# Allegro board ESP332.brd
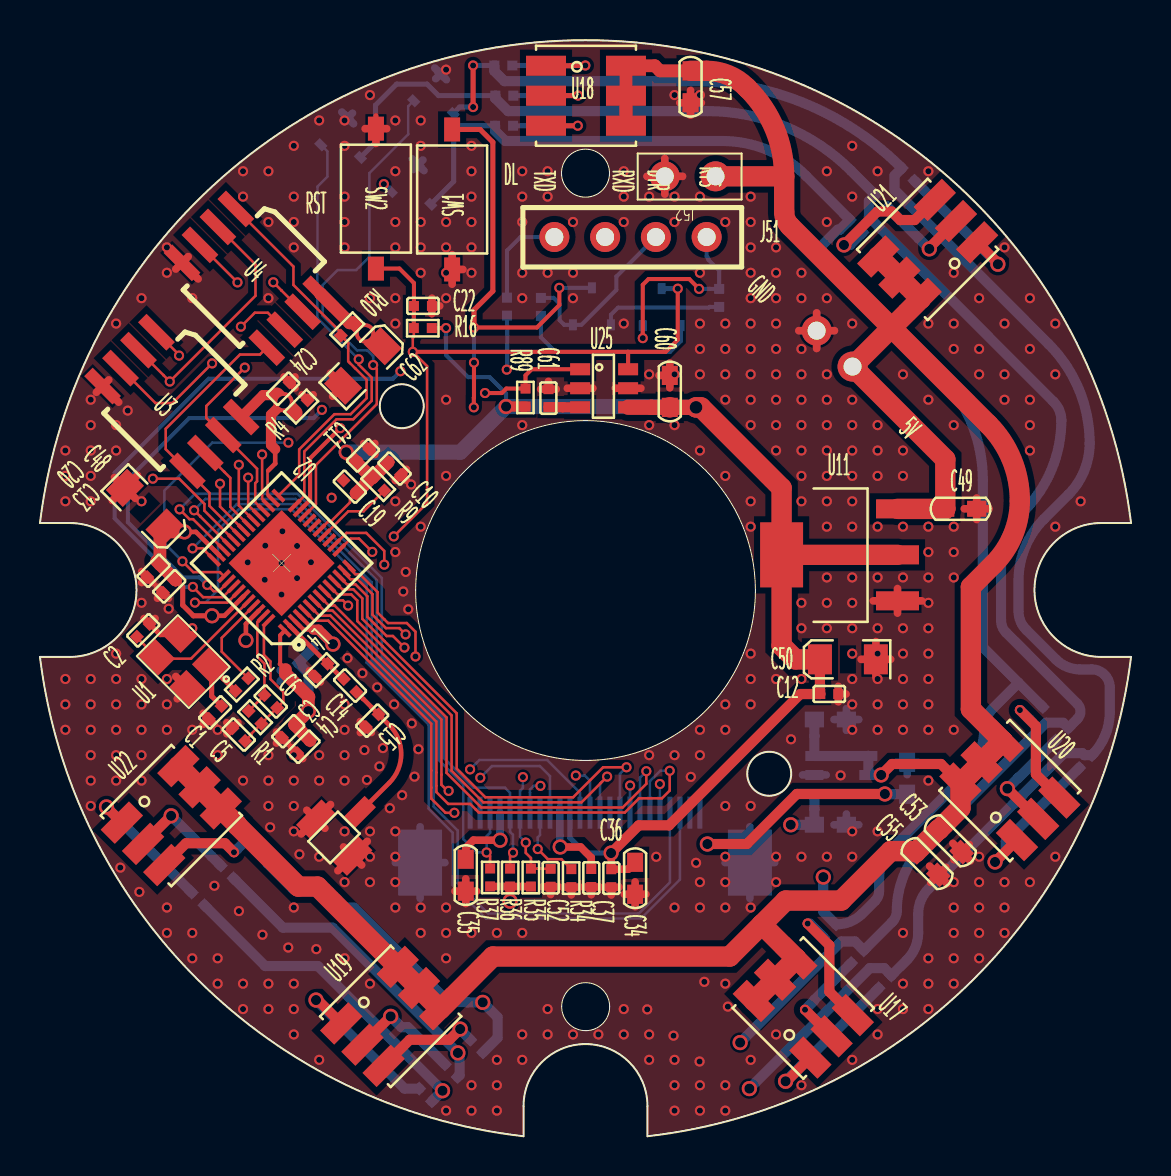
[diagram p0: board, top side]
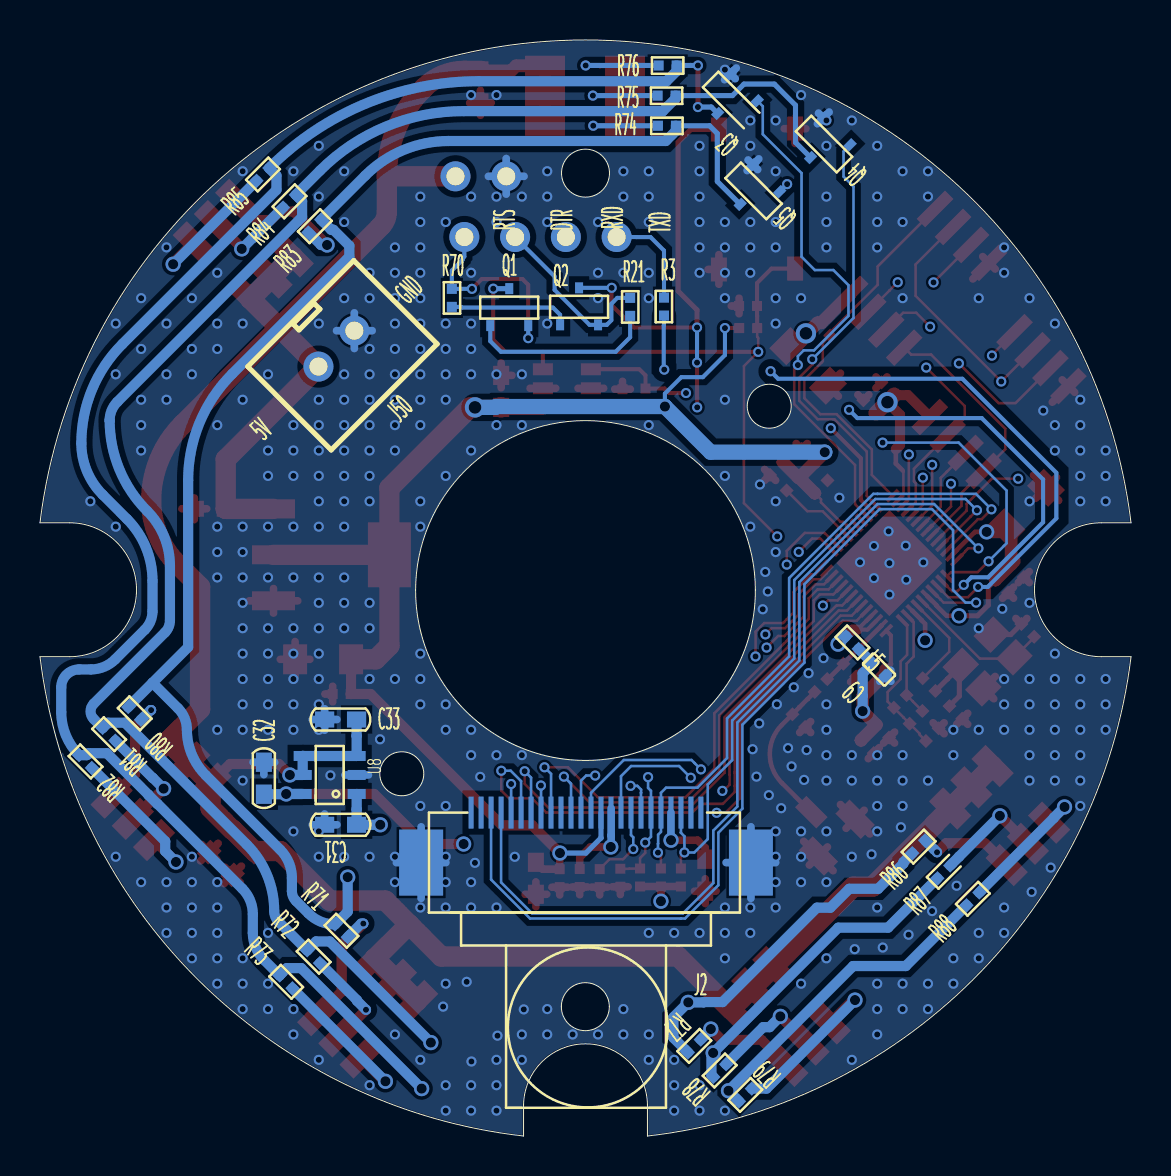
[diagram p1: board, bottom side, seen from below]

Outline 54.59 x 54.82 mm; copper layers: TOP, GND, SIG, BOTTOM. Coordinates in mm from the lower left corner of the outline.
Outline path: circle c18.1,36.51 r1.1 ; circle c27.3,48.16 r1.2 ; circle c36.49,18.12 r1.1 ; 0,30.67 arc(27.3,54.82) 54.59,30.67 53.11,30.67 arc(49.76,27.32) 53.11,23.97 54.59,23.97 arc(46.65,7.79) 30.4,0 30.4,1.51 arc(27.3,4.61) 24.2,1.51 24.2,0 arc(7.94,7.79) 0,23.97 1.48,23.97 arc(4.83,27.32) 1.48,30.67 0,30.67 ; 18.8,27.32 arc(27.3,35.82) 35.8,27.32 arc(27.3,18.82) 18.8,27.32 ; 26.1,6.47 arc(27.3,7.67) 28.5,6.47 arc(27.3,5.27) 26.1,6.47

## Design rules (mm)
net group DTR: nets DTR N16908429
net group RTS: nets N16908427 RTS
net group LED_B: nets LED_B N16960286 N16960785 N16961158 N16961522 N16961899 N16962291
net group LED_G: nets LED_G N16960306 N16960795 N16961160 N16961524 N16961901 N16962293
net group LED_R: nets LED_R N16960332 N16960797 N16961162 N16961526 N16961903 N16962295
net group RF: nets N16860839 N16860948 N16861170 N16861179 N16861214 N16861260 N16861530 N16861598 N16884685

## Placement (name value [footprint] x y rotation side)
C1  GRM1555C1H150JA01D  [C0402]  9.08 21.51 225 top
C2  GRM1555C1H150JA01D  [C0402]  4.85 24.98 45 top
C3  100pF/6.3V(10%)  [C0402]  12.74 20.57 225 top
C4  0.1uF/6.3V(10%)  [C0402]  13.51 19.79 225 top
C5  10nF/6.3V(10%)  [C0402]  10.26 19.76 135 top
C6  3.3nF/6.3V(10%)  [C0402]  11.23 22.06 315 top
C9  0.1uF/6.3V(10%)  [C0402]  12.93 23.66 225 bottom
C10  0.1uF/6.3V(10%)  [C0402]  17.42 33.71 315 top
C11  1uF/10V(20%)  [C0402]  15.84 33.73 45 top
C12  10uF/6.3V(20%)  [C0402]  39.04 22.11 0 top
C13  10uF/6.3V(20%)  [C0402]  6.79 27.81 225 top
C14  LQP15MN3N6B02D  [C0402]  15.2 22.86 314.3 top
C15  GRM1555C1H2R0BA01D  [C0402]  16.3 20.46 45 top
C19  0.1uF/6.3V(10%)  [C0402]  15.82 32.16 135 top
C20  1uF/10V(20%)  [C0402]  6 28.6 225 top
C22  1uF/10V(20%)  [C0402]  18.71 41.52 0 top
C24  1uF/10V(20%)  [C0402]  11.85 37.06 45 top
C31  10uF/10V(20%)  [C0603]  40.35 15.57 180 bottom
C32  10uF/10V(20%)  [C0603]  43.39 18.7 270 bottom
C33  10uF/10V(20%)  [C0603]  40.35 20.83 180 bottom
C34  4.7uF/10V(20%)  [C0603]  29.78 13.69 270 top
C35  4.7uF/10V(20%)  [C0603]  21.3 13.85 270 top
C36  0.1uF/16V(10%)  [C0402]  28.58 13.35 270 top
C37  1uF/10V(20%)  [C0402]  27.58 13.36 270 top
C48  47uF/6.3V(20%)  [C1206]  6.23 30.44 315 top
C49  10uF/16V  [C0603]  45.27 31.38 0 top
C50  22uF/16V  [C1206]  39.03 23.84 180 top
C52  1uF/10V(20%)  [C0402]  25.55 13.37 270 top
C53  0.1uF/16V  [C0603]  44.98 15.33 315 top
C55  0.1uF/16V  [C0603]  43.82 14.19 315 top
C57  0.1uF/16V  [C0603]  32.55 53.28 270 top
C60  0.1uF/16V  [C0603]  31.51 36.45 90 top
C61  220nF/6.3V  [C0402]  25.44 36.46 90 top
C62  47uF/10V(20%)  [C1206]  17.15 39.51 45 top
J2  FFC_24P_0P5  [OV9650FSL_PCB]  21.52 16.18 180 bottom
J39  IPEX  [ECT8180001581]  16 16.2 135 top
J50  CON2  [XH_2_54_2P]  40.66 38.49 135 bottom
J51  CON4  [CON_2_54_4P]  25.74 44.97 0 top
J52  CON2  [CON_2_54_2P]  33.8 48 180 top
L4  GRM1555C1H2R0BA01D  [R0402]  14.39 23.63 225 top
L5  2.0nH  [R0402]  14.26 25 225 bottom
Q1  S8050(NPN)  [SOT23-3]  31.11 42.39 180 bottom
Q2  S8050(NPN)  [SOT23-3]  27.62 42.43 180 bottom
Q3  S8050(NPN)  [SOT23-3]  20.68 51.15 45 bottom
Q4  S8050(NPN)  [SOT23-3]  16.03 48.95 45 bottom
Q5  S8050(NPN)  [SOT23-3]  19.55 46.6 45 bottom
R1  20K(5%)  [R0402]  10.44 21.26 315 top
R2  51R(5%)  [R0402]  9.79 22.26 45 top
R3  499R(1%)  [R0402]  23.37 41.04 90 bottom
R4  2K/NC  [R0402]  12.76 36.17 45 top
R9  10K(1%)(NC)  [R0402]  16.6 32.93 315 top
R10  10K(1%)  [R0402]  15.69 40.68 225 top
R16  10K(1%)  [R0402]  19.61 40.41 180 top
R21  12K(1%)  [R0402]  25.06 41.92 270 bottom
R34  10K(1%)  [R0402]  26.59 12.45 90 top
R35  10K(1%)  [R0402]  24.57 12.48 90 top
R36  3.3K(5%)  [R0402]  23.52 13.38 270 top
R37  3.3K(5%)  [R0402]  22.52 13.38 270 top
R70  12K(1%)  [R0402]  33.98 42.37 270 bottom
R71  100  [R0402]  39.83 10.58 225 bottom
R72  100  [R0402]  41.22 9.29 225 bottom
R73  100  [R0402]  42.6 8.03 225 bottom
R74  100  [R0402]  22.77 50.54 0 bottom
R75  100  [R0402]  22.79 52.04 0 bottom
R76  100  [R0402]  22.73 53.55 0 bottom
R77  100  [R0402]  22.17 4.18 135 bottom
R78  100  [R0402]  20.9 2.95 135 bottom
R79  100  [R0402]  19.61 1.73 135 bottom
R80  100  [R0402]  50.17 21.46 225 bottom
R81  100  [R0402]  51.46 20.41 225 bottom
R82  100  [R0402]  52.63 19.05 225 bottom
R83  100  [R0402]  40.52 45.83 315 bottom
R84  100  [R0402]  41.79 47.08 315 bottom
R85  100  [R0402]  43.12 48.42 315 bottom
R86  100  [R0402]  10.94 14.15 135 bottom
R87  100  [R0402]  9.68 12.89 135 bottom
R88  100  [R0402]  8.23 11.54 135 bottom
R89  10K(1%)  [R0402]  24.29 36.49 90 top
SW1  SW PUSHBUTTON  [KEY_3X6]  20.62 43.35 90 top
SW2  SW PUSHBUTTON  [KEY_3X6]  16.81 50.39 270 top
U1  40MHz+/-10ppm  [CRY_3225]  7.39 22.39 135 top
U2  ESP32-D0WD  [SLP48_5X5]  12.09 28.65 135 top
U3  EN25QH128A  [RZ7889]  4.45 34.47 315 top
U4  PSRAM64H  [RZ7889]  8.43 40.64 315 top
U8  RT9011-BM-PJ6  [SOT-23-6]  40.1 18.06 90 bottom
U11  TLV1117-33IDCY  [SOT223]  42.91 26.77 90 top
U17  RGB  [RGB_6]  38.19 6.4 315 top
U18  RGB  [RGB_6]  27.32 52.04 180 top
U19  RGB  [RGB_6]  17.55 5.98 225 top
U20  RGB  [RGB_6]  48.53 17.28 315 top
U21  RGB  [RGB_6]  44.42 44.35 45 top
U22  RGB  [RGB_6]  6.57 16.03 225 top
U25  TPS3813K33DBVT  [SOT23-6]  27.03 38.35 0 top

## Library data of the parts
C1-C6 C9-C15 C19 C20 C22 C24 C31-C37 C48-C50 C52 C53 C55 C57 C60-C62 = CAP NP
J2 = CON24_4
J39 = IPEX_0
J50 J52 = CON2
J51 = CON4
L4 L5 = CHOKE
Q1-Q5 = NPN BCE_2
R1-R4 R9 R10 = RESISTOR
R16 R89 = RESISTOR_0: signal model: DEFAULT_RESISTOR_10000OHM_1_2
R21 R34-R37 R70-R88 = RESISTOR_0: signal model: DEFAULT_RESISTOR_200OHM_1_2
SW1 = SW PUSHBUTTON_0
SW2 = SW PUSHBUTTON
U1 = X1_1
U2 = ESP8080_24
U3 = FLASH_3
U4 = PN18S32
U8 = NCP1117_3
U11 = TLV1117-33IDCY
U17-U22 = LED_RGB
U25 = TPS3813K33DBVT

## Footprints (pads in the part's own frame, mm; a bottom-side part is the same pattern mirrored in y, then rotated)
C0402
  rect 0.5x0.5 smd: 1(0,0) 2(0.9,0)
C0603
  rect 0.96x0.8 smd: 1(0,0) 2(1.6,0)
C1206
  rect 1.2x1.5 smd: 1(0,0) 2(-2.8,0)
CON_2_54_2P
  round 1.5 hole 0.9: 1(0,0) 2(2.54,0)
CON_2_54_4P
  round 1.5 hole 0.9: 1(0,0) 2(2.54,0) 3(5.08,0) 4(7.62,0)
CRY_3225
  rect 1.4x1.2 smd: 1(0,-1.6) 2(2.2,-1.6) 3(2.2,0) 4(0,0)
ECT8180001581
  rect 0.8x1.5 smd: 1(0,0)
  rect 1x1.8 smd: 2(-1.3,1.8) 3(1.3,1.8)
KEY_3X6
  rect 1.2x0.8 smd: 1(0,0) 2(7,0)
OV9650FSL_PCB
  rect 0.25x1.6 smd: 1(0,0) 2(-0.5,0) 3(-1,0) 4(-1.5,0) 5(-2,0) 6(-2.5,0) 7(-3,0) 8(-3.5,0) 9(-4,0) 10(-4.5,0) 11(-5,0) 12(-5.5,0) 13(-6,0) 14(-6.5,0) 15(-7,0) 16(-7.5,0) 17(-8,0) 18(-8.5,0) 19(-9,0) 20(-9.5,0) 21(-10,0) 22(-10.5,0) 23(-11,0) 24(-11.5,0)
  rect 2.2x3.3 smd: 25(-14,-2.5) 26(2.5,-2.5)
R0402
  rect 0.5x0.5 smd: 1(0,0) 2(0.9,0)
RGB_6
  rect 2x1 smd: 1(2,-1.5) 2(2,0) 3(2,1.5) 4(-2,1.5) 5(-2,0) 6(-2,-1.5)
RZ7889
  rect 2x0.6 smd: 1(-3.082,5.025) 2(-3.082,3.755) 3(-3.082,2.485) 4(-3.082,1.215) 5(2.918,1.215) 6(2.918,2.485) 7(2.918,3.755) 8(2.918,5.025)
SLP48_5X5
  rect 0.8x0.2 smd: 1(-2.5,2.275) 2(-2.5,1.925) 3(-2.5,1.575) 4(-2.5,1.225) 5(-2.5,0.875) 6(-2.5,0.525) 7(-2.5,0.175) 8(-2.5,-0.175) 9(-2.5,-0.525) 10(-2.5,-0.875) 11(-2.5,-1.225) 12(-2.5,-1.575) 13(-2.5,-1.925) 14(-2.5,-2.275) 25(2.5,-2.275) 26(2.5,-1.925) 27(2.5,-1.575) 28(2.5,-1.225) 29(2.5,-0.875) 30(2.5,-0.525) 31(2.5,-0.175) 32(2.5,0.175) 33(2.5,0.525) 34(2.5,0.875) 35(2.5,1.225) 36(2.5,1.575) 37(2.5,1.925) 38(2.5,2.275)
  rect 0.2x0.8 smd: 15(-1.575,-2.5) 16(-1.225,-2.5) 17(-0.875,-2.5) 18(-0.525,-2.5) 19(-0.175,-2.5) 20(0.175,-2.5) 21(0.525,-2.5) 22(0.875,-2.5) 23(1.225,-2.5) 24(1.575,-2.5) 39(1.575,2.5) 40(1.225,2.5) 41(0.875,2.5) 42(0.525,2.5) 43(0.175,2.5) 44(-0.175,2.5) 45(-0.525,2.5) 46(-0.875,2.5) 47(-1.225,2.5) 48(-1.575,2.5)
  rect 3.75x3.75 smd: 49(0,0)
SOT23-3
  rect 0.4x0.55 smd: 1(-0.95,-1.85) 2(0.95,-1.85) 3(0,0)
SOT23-6
  rect 1x0.6 smd: 1(0,0) 2(0,-0.95) 3(0,-1.9) 4(2.4,-1.9) 5(2.4,-0.95) 6(2.4,0)
SOT223
  rect 0.95x2.15 smd: 1(0,0) 2(2.3,0) 3(4.6,0)
  rect 3.25x2.15 smd: 4(2.3,5.8)
SOT-23-6
  rect 0.5x0.9 smd: 1(-0.95,-1.35) 2(0,-1.35) 3(0.95,-1.35) 4(0.95,1.35) 5(0,1.35) 6(-0.95,1.35)
XH_2_54_2P
  round 1.5 hole 0.9: 1(0,0) 2(2.54,0)

## Nets
AGND: C1.2 C2.2 C3.2 C4.2 C5.2 C9.2 C10.2 C11.2 C12.2 C13.2 C15.1 C19.2 C20.2 C22.2 C24.2 C31.1 C32.1 C33.1 C34.2 C35.2 C36.2 C37.2 C48.2 C49.2 C50.2 C52.2 C53.2 C55.2 C57.2 C60.2 C61.2 C62.2 J2.2(AGND) J2.15(DGND) J2.25(GND#25) J2.26(GND#26) J39.2(GND1) J39.3(GND2) J50.2 J52.2 L4.2 Q3.2(E) Q4.2(E) Q5.2(E) R4.2 R34.1 SW1.1 SW2.1 U1.2(GND#2) U1.4(GND#4) U2.49(GND) U3.4(GND) U4.4(VSS) U8.2(GND) U11.1(ADJ/GND) U25.2(GND) U25.5(WDR)
AVDD_2V8: C31.2 C35.1 J2.4(AVDD) U8.1(VOUT2)
DVDD_1V3: C32.2 C37.1 J2.10(DVDD) U8.6(VOUT1)
VBUS: C33.2 C49.1 C53.1 C55.1 C57.1 J50.1 J52.1 U8.3(EN2) U8.4(EN1) U8.5(VIN) U11.3(INPUT) U17.4(BA) U17.5(GA) U17.6(RA) U18.4(BA) U18.5(GA) U18.6(RA) U19.4(BA) U19.5(GA) U19.6(RA) U20.4(BA) U20.5(GA) U20.6(RA) U21.4(BA) U21.5(GA) U21.6(RA) U22.4(BA) U22.5(GA) U22.6(RA)
VDD_SDIO: C24.1 C62.1 R4.1 R10.1 U2.26(VDD_SDIO) U3.8(VCC) U4.8(VDD)
B: Q5.1(B) U2.34(GPIO5)
CAM_RESET: C52.1 J2.6(RESET) R35.2 U2.13(32K_XN)
DOVDD_3V3: C3.1 C4.1 C9.1 C10.1 C11.1 C12.1 C13.1 C19.1 C20.1 C34.1 C36.1 C48.1 C50.1 C60.1 J2.11(DOVDD) L5.2 R9.1 R16.1 R35.1 R36.2 R37.2 R89.1 U2.1(VDDA#1) U2.19(VDD3P3_RTC) U2.37(VDD3P3_CPU) U2.43(VDDA#43) U2.46(VDDA#46) U11.2(OUTPUT#2) U11.4(OUTPUT#4) U25.4(VCC)
DTR: J51.3 Q2.2(E) R21.1
DVP_HREF: J2.9(HREF) U2.5(SENSOR_VP)
DVP_PCLK: J2.17(PCLK) U2.12(32K_XP)
DVP_VSYNC: J2.7(VSYNC) U2.15(GPIO26)
DVP_Y2: J2.19(Y2) U2.6(SENSOR_CAPP)
DVP_Y3: J2.21(Y3) U2.38(GPIO19)
DVP_Y4: J2.22(Y4) U2.42(GPIO21)
DVP_Y5: J2.20(Y5) U2.16(GPIO27)
DVP_Y6: J2.18(Y6) U2.8(SENSOR_VN)
DVP_Y7: J2.16(Y7) U2.11(VDET_2)
DVP_Y8: J2.14(Y8) U2.10(VDET_1)
DVP_Y9: J2.12(Y9) U2.7(SENSOR_CAPN)
EN: C22.1 Q1.3(C) R16.2 SW2.2 U2.9(CHIP_PU) U25.6(R\E\S\E\T\)
FLASH_CLK: U2.31(SD_CLK) U3.6(CLK)
G: Q4.1(B) U2.24(GPIO4)
I2C_SCL: J2.5(SCL) R36.1 U2.36(GPIO23)
I2C_SDA: J2.3(SDA) R37.1 U2.35(GPIO18)
IO0: Q2.3(C) SW1.2 U2.23(GPIO0)
IO2: Q3.1(B) U2.22(GPIO2)
IO12: R9.2 U2.18(MTDI)
IO16: R10.2 U2.25(GPIO16) U4.1(CS#)
IO17: U2.27(GPIO17) U4.6(SCLK)
IO25: J2.13(XCLK) U2.14(GPIO25)
LED_B: Q5.3(C) R71.1 R74.1 R77.1 R80.1 R83.1 R86.1
LED_G: Q4.3(C) R72.1 R75.1 R78.1 R81.1 R84.1 R87.1
LED_R: Q3.3(C) R73.1 R76.1 R79.1 R82.1 R85.1 R88.1
PWDN: J2.8(PWDN) R34.2
RTS: J51.4 Q1.2(E) R70.1
RXD0: J51.2 U2.40(U0RXD)
SCS/CMD: U2.30(SD_CMD) U3.1(/CS)
SDI/SD1: U2.33(SD_DATA_1) U3.5(DI) U4.5(SI/SIO0)
SDO/SD0: U2.32(SD_DATA_0) U3.2(DO) U4.2(SO/SIO1)
SHD/SD2: U2.28(SD_DATA_2) U3.7(/HOLD) U4.7(SIO3)
SWP/SD3: U2.29(SD_DATA_3) U3.3(/WP) U4.3(SIO2)
TXD0: J51.1 R3.2
WDI: R89.2 U2.39(GPIO22) U25.1(WDI)
N16860839: C5.1 C6.2 R1.2 U2.48(CAP1)
N16860948: L5.1 U2.3(VDD3P3#3) U2.4(VDD3P3#4)
N16861170: C14.2 C15.2 J39.1(RF)
N16861179: C2.1 U1.3(XOUT) U2.44(XTAL_N)
N16861214: C1.1 R2.1 U1.1(XIN)
N16861260: C6.1 R1.1 U2.47(CAP2)
N16861530: R3.1 U2.41(U0TXD)
N16861598: R2.2 U2.45(XTAL_P)
N16884685: C14.1 L4.1 U2.2(LNA_IN)
N16908427: Q2.1(B) R70.2
N16908429: Q1.1(B) R21.2
N16960286: R71.2 U17.3(BK)
N16960306: R72.2 U17.2(GK)
N16960332: R73.2 U17.1(RK)
N16960785: R74.2 U18.3(BK)
N16960795: R75.2 U18.2(GK)
N16960797: R76.2 U18.1(RK)
N16961158: R77.2 U19.3(BK)
N16961160: R78.2 U19.2(GK)
N16961162: R79.2 U19.1(RK)
N16961522: R80.2 U20.3(BK)
N16961524: R81.2 U20.2(GK)
N16961526: R82.2 U20.1(RK)
N16961899: R83.2 U21.3(BK)
N16961901: R84.2 U21.2(GK)
N16961903: R85.2 U21.1(RK)
N16962291: R86.2 U22.3(BK)
N16962293: R87.2 U22.2(GK)
N16962295: R88.2 U22.1(RK)
N16988764: C61.1 U25.3(WDT)

Pads without a net: J2 1 23 24; U2 17 20 21

## Via types
v1: diameter 0.508, hole 0.305, TOP to BOTTOM, 489 vias
v2: diameter 0.762, hole 0.508, TOP to BOTTOM, 32 vias
v3: diameter 1.016, hole 0.635, TOP to BOTTOM, 3 vias

## Routing (per net, layer and track width the routed paths; a pad name or vN(x,y) marks a point on that pad's centre or on a via; arc(x,y) is an arc through that point)
AGND: length 124.7
  TOP w0.254: C2.2 6.02,25.08 U1.2 ; 16.81,51.04 SW2.1
  TOP w0.381: J39.2 16.38,14.74 ; J39.2 15.19,14.46 ; J39.2 14.91,13.27 ; J39.2 16.09,13.55 ; SW1.1 20.62,44.09 ; SW1.1 20.62,42.61 ; SW1.1 21.16,43.35 ; 46.25,31.38 C49.2 ; C49.2 46.87,31.91 ; C49.2 46.87,30.84 ; C49.2 47.49,31.38 ; 29.78,11.47 C34.2 ; C34.2 29.78,12.71 ; C34.2 29.24,12.09 ; C34.2 30.32,12.09 ; 44.57,12.68 C55.2 ; C55.2 45.33,13.44 ; C55.2 45.39,12.62 ; C55.2 44.51,13.5 ; U3.4 3.44,37.82 ; U3.4 3.94,36.71 ; U3.4 2.82,37.2 ; 41.69,26.77 U11.1 ; U11.1 44.12,26.77 ; U11.1 42.91,26.16 ; U11.1 42.91,27.38 ; 6.87,21.87 U1.4 6.8,22.99 ; C3.2 12.38,19.66 ; C3.2 11.83,19.66 ; C3.2 11.83,20.21 ; C10.2 18.33,33.35 ; C10.2 18.33,32.8 ; C10.2 17.78,32.8 ; C11.2 16.75,34.09 ; C11.2 16.2,34.64 ; C11.2 16.75,34.64 ; 28.58,12.06 C36.2 ; C36.2 28.19,12.45 ; C36.2 28.97,12.45 ; 32.55,51.06 C57.2 ; C57.2 33.09,51.68 ; C57.2 32.55,52.3 ; C57.2 32.01,51.68 ; 25.16,12.47 C52.2 ; C52.2 25.94,12.47 ; C52.2 25.55,12.08 ; 13.35,16.3 J39.3 ; J39.3 13.07,15.11 ; J39.3 14.26,15.39 ; J39.3 14.54,16.58 ; U4.4 7.42,43.99 ; U4.4 7.91,42.87 ; U4.4 6.3,44.48 ; U4.4 6.8,43.37 ; C22.2 19.61,41.91 ; C22.2 20,41.52 ; C22.2 19.61,41.13 ; 12.59,19.43 C4.2 13.15,18.88 ; 26.2,12.45 R34.1 ; R34.1 26.98,12.45 ; R34.1 26.59,12.06 ; 16.27,50.39 SW2.1 ; SW2.1 17.35,50.39 ; SW2.1 16.81,49.65 ; 13.48,23.26 L4.2 14.03,22.71 ; C53.2 46.5,14.58 ; C53.2 45.68,14.64 ; C53.2 46.55,13.76 ; C53.2 45.73,13.82 ; C61.2 25.44,37.75 ; C61.2 25.83,37.36 ; C61.2 25.05,37.36 ; 14.54,38.16 C62.2 14.64,37.01 ; C24.2 12.76,37.97 ; C24.2 12.76,37.42 ; C24.2 12.21,37.97 ; 16.03,20.73 C15.1 ; C15.1 16.03,20.18 ; C15.1 16.58,20.18 ; 8.17,20.6 C1.2 ; C1.2 8.72,20.6 ; C1.2 8.17,21.15 ; J50.2 38.86,41.17 ; J50.2 39.75,40.28 ; J50.2 37.97,40.28 ; J50.2 38.86,39.39 ; 5.09,28.23 C20.2 ; C20.2 5.64,27.68 ; C20.2 5.09,27.68 ; C12.2 40.33,22.11 ; C12.2 39.94,22.5 ; C12.2 39.94,21.72 ; 5.88,27.45 6.15,27.18 ; 6.15,27.18 6.43,26.9 ; 6.15,27.18 5.88,26.9 ; 20.76,12.25 C35.2 ; C35.2 21.3,12.87 ; C35.2 21.3,11.63 ; C35.2 21.84,12.25 ; 26.39,37.4 U25.2 27.67,37.4 ; C60.2 31.51,38.67 ; C60.2 30.97,38.05 ; C60.2 31.51,37.43 ; C48.2 4.77,31.9 ; C48.2 3.62,31.79 ; C48.2 4.88,33.05 ; C48.2 3.73,32.94 ; 41.83,22.95 C50.2 ; C50.2 42.57,23.84 ; C50.2 41.09,23.84 ; C50.2 41.83,24.73 ; 27.58,12.07 C37.2 ; C37.2 27.19,12.46 ; C37.2 27.97,12.46 ; 31.26,47.11 J52.2 ; J52.2 32.15,48 ; J52.2 31.26,48.89 ; J52.2 30.37,48 ; C5.2 9.9,20.67 ; C5.2 9.35,20.12 ; C5.2 9.35,20.67 ; 5.21,25.89 C2.2 5.76,25.89 ; 28.79,37.4 U25.5 30.07,37.4 ; 13.67,37.08 R4.2 13.12,37.08
  GND w0.127: J52.2 32.15,48 ; J52.2 30.37,48 ; J52.2 31.26,48.89 ; J52.2 31.26,47.11 ; 37.97,40.28 J50.2 ; J50.2 38.86,41.17 ; J50.2 39.75,40.28 ; J50.2 38.86,39.39
  SIG w0.127: 31.26,47.11 J52.2 ; J52.2 30.37,48 ; J52.2 32.15,48 ; J52.2 31.26,48.89 ; 37.97,40.28 J50.2 ; J50.2 38.86,41.17 ; J50.2 39.75,40.28 ; J50.2 38.86,39.39
  BOTTOM w0.381: 19.75,53.42 Q3.2 ; Q3.2 20.28,53.37 ; Q3.2 20.34,52.84 ; Q3.2 19.8,52.89 ; C31.1 40.97,15.57 ; C31.1 40.35,16.11 ; C31.1 39.73,15.57 ; Q5.2 19.21,48.29 ; Q5.2 19.16,48.82 ; Q5.2 18.62,48.88 ; Q5.2 18.68,48.34 ; 31.26,47.11 J52.2 ; J52.2 31.26,48.89 ; J52.2 30.37,48 ; J52.2 32.15,48 ; C33.1 40.97,20.83 ; C33.1 39.73,20.83 ; C33.1 40.35,21.37 ; C33.1 40.35,20.29 ; C9.2 12.57,22.75 ; C9.2 12.02,22.75 ; C9.2 12.02,23.3 ; 19.02,11.89 J2.26 ; J2.26 17.78,13.68 ; J2.26 19.02,15.47 ; J2.26 20.26,13.68 ; 43.39,18.08 C32.1 ; C32.1 43.93,18.7 ; C32.1 43.39,18.88 ; C32.1 42.85,18.7 ; 34.28,13.68 J2.25 ; J2.25 35.52,11.89 ; J2.25 35.52,15.47 ; J2.25 36.76,13.68 ; 39.34,18.06 U8.2 38.16,18.06 ; Q4.2 15.64,51.17 ; Q4.2 15.69,50.63 ; Q4.2 15.1,51.22 ; 38.86,39.39 J50.2 ; J50.2 37.97,40.28 ; J50.2 39.75,40.28 ; J50.2 38.86,41.17
  vias: v1(1.27,34.29) v1(1.27,33.02) v1(1.27,31.75) v1(1.27,22.86) v1(1.27,21.59) v1(1.27,20.32) v1(2.54,36.83) v1(2.54,35.56) v1(2.54,34.29) v1(2.54,33.02) v1(2.54,31.75) v1(2.54,22.86) v1(2.54,21.59) v1(2.54,20.32) v1(2.54,19.05) v1(2.54,17.78) v1(2.54,16.51) v1(3.81,40.64) v1(3.81,35.56) v1(3.81,34.29) v1(3.81,24.13) v1(3.81,22.86) v1(3.81,21.59) v1(3.81,20.32) v1(3.81,19.05) v1(3.81,17.78) v1(4.02,13.43) v1(4.39,36.29) v1(4.97,12.21) v1(5.08,41.91) v1(5.08,31.75) v1(5.08,26.67) v1(5.08,22.86) v1(5.08,21.59) v1(5.08,20.32) v1(5.08,19.05) v1(5.08,17.78) v1(6.35,44.45) v1(6.35,43.18) v1(6.44,26.37) v1(6.35,22.86) v1(6.35,21.59) v1(6.35,20.32) v1(6.35,11.43) v1(6.35,10.16) v1(7.62,41.91) v1(7.62,25.4) v1(7.62,20.32) v1(7.62,10.16) v1(7.62,8.89) v1(8.73,12.52) v1(8.89,20.32) v1(8.89,19.05) v1(8.89,8.89) v1(8.89,7.62) v1(9.95,11.25) v1(10.16,48.26) v1(10.16,46.99) v1(10.16,17.78) v1(10.16,7.62) v1(10.16,6.35) v1(10.39,28.7) v1(11.13,10.07) v1(11.27,29.53) v1(11.25,27.82) v1(11.43,48.26) v1(11.43,45.72) v1(11.43,41.91) v1(11.43,19.05) v1(11.43,17.78) v1(11.43,16.51) v1(11.43,7.62) v1(11.43,6.35) v1(11.52,15.45) v1(12.13,30.25) v1(12.09,28.65) v1(12.09,27.08) v1(12.42,9.43) v1(12.7,49.53) v1(12.7,46.99) v1(12.7,45.72) v1(12.7,44.45) v1(12.7,19.05) v1(12.7,17.78) v1(12.7,16.51) v1(12.7,15.24) v1(12.7,11.43) v1(12.7,7.62) v1(12.7,6.35) v1(12.7,5.08) v1(12.86,29.52) v1(12.86,27.91) v1(12.98,14.09) v1(13.56,28.7) v1(13.83,9.35) v1(13.97,50.8) v1(13.97,19.05) v1(13.97,17.78) v1(13.97,13.97) v1(13.97,3.81) v1(14.59,31.93) v1(15.24,50.8) v1(15.24,49.53) v1(15.24,46.99) v1(15.24,45.72) v1(15.24,44.45) v1(15.24,21.59) v1(15.24,20.32) v1(15.24,19.05) v1(15.24,17.78) v1(15.24,15.24) v1(15.24,12.7) v1(15.24,8.89) v1(15.39,23.9) v1(16.13,23.15) v1(16.23,19.31) v1(16.36,17.81) v1(16.51,52.07) v1(16.51,41.91) v1(16.51,15.24) v1(16.51,13.97) v1(16.51,12.7) v1(16.51,7.62) v1(16.87,22.44) v1(16.98,18.49) v1(17.16,19.4) v1(17.51,16.4) v1(17.72,21.59) v1(17.78,50.8) v1(17.78,48.26) v1(17.78,45.72) v1(17.78,44.45) v1(17.78,41.91) v1(17.78,40.64) v1(17.78,31.75) v1(17.78,29.21) v1(17.78,15.24) v1(17.78,13.97) v1(17.78,12.7) v1(17.78,11.43) v1(18.12,17.05) v1(18.18,27.24) v1(18.3,28.22) v1(18.43,26.35) v1(18.57,32.59) v1(18.6,20.64) v1(18.74,17.98) v1(18.94,19.35) v1(19.05,50.8) v1(19.05,49.53) v1(19.05,45.72) v1(19.05,44.45) v1(19.05,43.18) v1(19.05,30.48) v1(19.05,11.43) v1(19.05,10.16) v1(20.32,53.34) v1(20.32,45.72) v1(20.32,44.45) v1(20.32,43.18) v1(20.32,41.91) v1(20.32,36.83) v1(20.32,33.02) v1(20.32,11.43) v1(20.32,10.16) v1(20.32,8.89) v1(20.32,1.27) v1(21.59,49.53) v1(21.59,48.26) v1(21.59,46.99) v1(21.59,45.72) v1(21.59,44.45) v1(21.59,43.18) v1(21.59,10.16) v1(21.59,2.54) v1(21.59,1.27) v1(22.86,10.16) v1(22.86,3.81) v1(22.86,2.54) v1(22.86,1.27) v1(24.13,48.26) v1(24.13,46.99) v1(24.13,45.72) v1(24.13,43.18) v1(24.13,41.91) v1(24.13,35.56) v1(24.13,10.16) v1(24.13,5.08) v1(24.13,3.81) v1(25.4,48.26) v1(25.4,46.99) v1(25.4,43.18) v1(25.4,6.35) v1(25.4,5.08) v1(26.67,45.72) v1(26.67,43.18) v1(26.67,41.91) v1(26.67,5.08) v1(27.94,5.08) v1(29.21,48.26) v1(29.21,46.99) v1(29.21,45.72) v1(29.21,40.64) v1(29.21,6.35) v1(29.21,5.08) v1(30.38,6.33) v1(30.48,46.99) v1(30.48,38.1) v1(30.48,35.56) v1(30.48,19.05) v1(30.48,5.08) v1(30.48,3.81) v1(30.83,13.97) v1(31.7,5.02) v1(31.75,52.07) v1(31.75,46.99) v1(31.75,45.72) v1(31.75,38.1) v1(31.75,35.56) v1(31.75,19.05) v1(31.75,11.43) v1(31.75,3.81) v1(31.75,2.54) v1(31.75,1.27) v1(32.56,17.96) v1(32.83,13.67) v1(33.02,52.07) v1(33.02,46.99) v1(33.02,43.18) v1(33.02,40.64) v1(33.02,39.37) v1(33.02,38.1) v1(33.02,34.29) v1(33.02,20.32) v1(33.02,19.05) v1(33.02,12.7) v1(33.02,11.43) v1(33,3.73) v1(33.02,2.54) v1(33.02,1.27) v1(33.24,7.71) v1(34.29,45.72) v1(34.29,40.64) v1(34.29,39.37) v1(34.29,38.1) v1(34.29,36.83) v1(34.29,33.02) v1(34.29,21.59) v1(34.29,20.32) v1(34.29,16.51) v1(34.29,13.97) v1(34.29,12.7) v1(34.29,11.43) v1(34.29,7.62) v1(34.29,2.54) v1(34.29,1.27) v1(34.42,6.47) v1(35.56,46.99) v1(35.56,45.72) v1(35.56,44.45) v1(35.56,43.18) v1(35.56,41.91) v1(35.56,40.64) v1(35.56,39.37) v1(35.56,38.1) v1(35.56,36.83) v1(35.56,35.56) v1(35.56,31.75) v1(35.56,30.48) v1(35.56,24.13) v1(35.56,22.86) v1(35.56,21.59) v1(35.56,16.51) v1(35.56,11.43) v1(35.56,3.81) v1(36.83,44.45) v1(36.83,43.18) v1(36.83,41.91) v1(36.83,40.64) v1(36.83,39.37) v1(36.83,38.1) v1(36.83,36.83) v1(36.83,35.56) v1(36.83,34.29) v1(36.83,22.86) v1(36.83,13.97) v1(36.83,12.7) v1(36.83,5.08) v1(37.58,19.84) v1(38.1,43.18) v1(38.1,41.91) v1(38.1,39.37) v1(38.1,38.1) v1(38.1,36.83) v1(38.1,35.56) v1(38.1,34.29) v1(38.1,33.02) v1(38.1,31.75) v1(38.1,26.67) v1(38.1,25.4) v1(38.1,22.86) v1(38.1,13.97) v1(38.1,2.54) v1(39.37,48.26) v1(39.37,45.72) v1(39.37,41.91) v1(39.37,38.1) v1(39.37,36.83) v1(39.37,35.56) v1(39.37,34.29) v1(39.37,33.02) v1(39.37,31.75) v1(39.37,30.48) v1(39.37,27.94) v1(39.37,26.67) v1(39.37,25.4) v1(39.37,13.97) v1(40.06,18.04) v1(40.64,49.53) v1(40.64,46.99) v1(40.64,40.64) v1(40.64,36.83) v1(40.64,35.56) v1(40.64,34.29) v1(40.64,33.02) v1(40.64,31.75) v1(40.64,30.48) v1(40.64,27.94) v1(40.64,26.67) v1(40.64,25.4) v1(40.64,24.13) v1(40.64,22.86) v1(40.64,21.59) v1(40.64,20.32) v1(40.64,15.24) v1(40.64,13.97) v1(40.64,3.81) v1(41.91,48.26) v1(41.91,35.56) v1(41.91,34.29) v1(41.91,33.02) v1(41.91,30.48) v1(41.91,27.94) v1(41.91,25.4) v1(41.91,24.13) v1(41.91,22.86) v1(41.91,21.59) v1(41.91,20.32) v1(41.91,15.24) v1(41.91,6.35) v1(41.91,5.08) v1(43.18,38.1) v1(43.18,34.29) v1(43.18,33.02) v1(43.18,30.48) v1(43.18,27.94) v1(43.18,25.4) v1(43.18,24.13) v1(43.18,22.86) v1(43.18,21.59) v1(43.18,20.32) v1(43.18,10.16) v1(43.18,7.62) v1(43.18,6.35) v1(44.45,48.26) v1(44.45,40.64) v1(44.45,36.83) v1(44.45,30.48) v1(44.45,29.21) v1(44.45,27.94) v1(44.45,26.67) v1(44.45,25.4) v1(44.45,24.13) v1(44.45,22.86) v1(44.45,21.59) v1(44.45,20.32) v1(44.45,17.78) v1(44.45,8.89) v1(44.45,7.62) v1(44.45,6.35) v1(45.72,43.18) v1(45.72,40.64) v1(45.72,39.37) v1(45.72,35.56) v1(45.72,30.48) v1(45.72,29.21) v1(45.72,27.94) v1(45.72,20.32) v1(45.72,12.7) v1(45.72,11.43) v1(45.72,10.16) v1(45.72,8.89) v1(45.72,7.62) v1(46.99,41.91) v1(46.99,39.37) v1(46.99,38.1) v1(46.99,13.97) v1(46.99,12.7) v1(46.99,11.43) v1(46.99,10.16) v1(46.99,8.89) v1(48.26,44.45) v1(48.26,40.64) v1(48.26,38.1) v1(48.26,36.83) v1(48.26,12.7) v1(48.26,11.43) v1(48.26,10.16) v1(49.53,41.91) v1(49.53,39.37) v1(49.53,36.83) v1(49.53,35.56) v1(49.53,34.29) v1(49.53,12.7) v1(50.8,40.64) v1(50.8,38.1) v1(50.8,30.48) v1(50.8,13.97) v1(52.07,31.75)
AVDD_2V8: length 21.4
  TOP w0.381: C35.1 21.3,14.42 21.69,14.8 v2(23.02,14.8)
  SIG w0.508: v2(37.56,15.57) 23.79,15.57 v2(23.02,14.8)
  BOTTOM w0.381: J2.4 23.02,14.8 v2(23.02,14.8)
  BOTTOM w0.508: v2(37.56,15.57) C31.2 38.75,16.35 38.75,16.35 U8.1
DVDD_1V3: length 23.9
  TOP w0.381: v2(26.03,14.46) 27.05,14.46 27.58,13.92 C37.1
  TOP w0.508: v2(33.39,14.61) 35.37,14.61 37.87,17.11 v2(42.27,17.11)
  SIG w0.381: v2(33.39,14.61) 32.7,14.61 32.35,14.95 26.52,14.95 v2(26.03,14.46)
  BOTTOM w0.381: 26.01,16.39 26.01,15.03 ; 26.01,15.03 26.01,14.48 v2(26.03,14.46) ; 26.01,15.03 26.02,15.04
  BOTTOM w0.508: U8.6 v2(42.27,17.11) 42.29,17.1 C32.2
VBUS: length 144.6
  TOP w0.508: v2(42.09,18.06) 42.64,18.61 45.08,18.61 U20.6
  TOP w0.635: C57.1 31.02,53.28 30.76,53.54 U18.6 U18.5 ; U18.5 U18.4 U18.5
  TOP w1.016: 45.26,31.37 45.29,31.37 45.3,31.38 45.3,33.85 J50.1 42.6,40.43 42.62,40.43 ; 45.26,31.37 C49.1 ; 45.26,31.37 U11.3 ; U21.4 U21.5 U21.6 42.62,40.43 ; U20.5 47.12,18.69 ; U20.5 U20.4 ; U20.5 47.12,18.69 ; 47.12,18.69 U20.6 ; 47.12,18.69 U20.6 ; 47.12,18.69 U20.4 ; U20.4 46.58,21.35 46.58,27.47 47.71,28.6 arc(48.68,30.06) 49.03,31.79 arc(48.62,33.85) 47.45,35.59 42.62,40.43 ; U20.6 46.05,16.4 C53.1 44.96,15.33 C55.1 43.76,14.25 42.56,14.25 40.09,11.78 37.31,11.78 36.12,10.59 ; 42.62,40.43 37.53,45.51 arc(37.31,45.84) 37.24,46.23 37.24,48 ; C57.1 33.36,53.28 arc(34.43,53.07) 35.34,52.46 35.42,52.38 arc(36.76,50.37) 37.24,48 ; 37.24,48 J52.1 ; U17.6 U17.5 U17.4 37.83,8.88 36.12,10.59 ; 36.12,10.59 34.51,8.98 22.66,8.98 U19.4 U19.5 U19.6 13.88,12.48 12.93,12.48 9.85,15.56 9.85,15.58 U22.4 U22.5 U22.6
  BOTTOM w0.508: v2(42.09,18.06) U8.5 U8.4 ; C33.2 38.75,20.01 38.75,20.01 U8.3 U8.4 ; U8.4 41.44,19.02
VDD_SDIO: length 19.3
  TOP w0.127: U2.26 11.39,32.08 11.39,33.25 11.42,33.29
  TOP w0.229: 11.42,33.29 11.77,33.64 11.77,34.36
  TOP w0.508: v3(12.19,36.71) 11.56,36.08 11.56,34.57 11.77,34.36 ; U3.8 11.16,37.06 C24.1
  TOP w0.635: C24.1 11.85,37.05 v3(12.19,36.71) ; R4.1 12.74,36.17 ; C62.1 16.91,39.51 v3(16.27,40.15) 16.22,40.15 R10.1 15.5,40.68 U4.8
  TOP w0.762: C24.1 12.19,36.72 v3(12.19,36.71) 12.21,36.71 R4.1
  SIG w0.635: v3(16.27,40.15) 15.67,39.55 15.66,39.55 15.25,39.14 15.25,39.13 14.83,38.71 14.19,38.71 v3(12.19,36.71)
B: length 29.1
  TOP w0.127: U2.34 8.23,31.28 8.23,31.62 6.96,32.88 v1(5.65,32.88)
  SIG w0.203: v1(5.65,32.88) 5.15,33.38 5.15,40.15 13.1,48.11 16.72,48.11 v1(17.21,47.61)
  BOTTOM w0.203: v1(17.21,47.61) 17.21,47.61 Q5.1
CAM_RESET: length 21.5
  TOP w0.127: v1(18.29,25.09) 17.98,25.41 17.31,25.41 16.99,25.72 16.64,26.08 16.64,27.1 15.89,27.85 15.53,27.85 15.22,28.16 U2.13 ; v1(24.31,14.68) 24.31,14.16 24.57,13.9 R35.2 25.1,13.38 25.11,13.37 C52.1
  SIG w0.127: v1(18.29,25.09) 18.03,25.09 17.77,24.83 17.77,23.54 23.35,17.95 v1(24.16,17.95)
  BOTTOM w0.127: v1(24.16,17.95) 24.16,17.41 24.02,17.27 J2.6 24.02,14.97 v1(24.31,14.68)
DOVDD_3V3: length 136
  TOP w0.127: C19.1 15.51,31.85 15.51,31.69 14.53,30.72 14.4,30.72 U2.19
  TOP w0.203: U2.1 12.25,25.28 12.02,25.05 12.02,23.62 12.01,23.61 ; R16.1 v1(20.32,40.41)
  TOP w0.229: U2.37 8.96,29.06 7.8,30.22 v2(7.22,30.22) ; v2(10.3,24.8) 10.3,25.62 10.49,25.8 10.49,25.81 U2.46 ; v2(8.61,26.02) 9.23,26.02 9.74,26.54 9.74,26.56 U2.43 ; 12.01,23.61 12.28,23.33
  TOP w0.254: v2(8.61,26.02) 7.67,26.02 7.14,26.56 7.14,27.46 C13.1
  TOP w0.381: R37.2 23.52,12.48 R36.2 ; R36.2 v2(23.52,11.75) ; R36.2 24.56,12.48 R35.1 ; C34.1 29.43,13.35 C36.1 28.58,13.35 28.58,14.15 v2(28.57,14.15)
  TOP w0.508: R89.1 v2(23.32,36.49) ; v2(28.57,14.15) 29.96,15.54 31.48,15.54 38.04,22.11 C12.1 39.03,22.13 C50.1
  TOP w0.635: 12.28,23.33 12.28,23.14 13.43,21.99 ; C20.1 6,30.21 C48.1 6.45,30.22 v2(7.22,30.22) ; C20.1 6.78,27.81 C13.1 ; C20.1 5.84,28.76 ; v2(15.32,34.21) 15.8,33.73 C11.1 15.84,33.68 R9.1 ; 13.46,21.96 13.43,21.99 ; 13.43,21.99 v2(13.43,21.25) C3.1 13.51,19.8 C4.1 ; C10.1 16.64,32.93 R9.1 ; R9.1 15.83,32.16 C19.1
  TOP w0.762: v3(32.82,36.45) C60.1 30.61,36.45 30.6,36.45 U25.4
  TOP w1.016: C50.1 37.79,23.84 37.11,24.53 U11.4 ; U11.4 U11.2 ; U11.4 37.11,32.41 33.07,36.45 v3(32.82,36.45) ; C60.1 31.52,36.46
  SIG w0.381: v2(28.57,14.15) 26.17,11.75 v2(23.52,11.75)
  SIG w0.635: v2(10.3,24.8) 10.34,24.8 11.28,25.73
  SIG w0.762: v2(7.22,30.22) 7.28,30.22 7.29,30.23 7.92,30.23 7.93,30.22 8.65,30.22 ; 10.24,26.77 13.43,23.59 v2(13.43,21.25) ; 10.24,26.77 8.65,28.37 8.65,30.22 ; 10.24,26.77 9.49,26.02 v2(8.61,26.02) ; 8.65,30.22 9.8,30.22 13.8,34.22 13.81,34.21 v2(15.32,34.21)
  BOTTOM w0.203: v1(20.32,40.41) 20.32,39.06 21.42,37.96 22.5,37.96 23.32,37.14 v2(23.32,36.49)
  BOTTOM w0.254: v2(28.57,14.15) 27.28,14.15 26.53,14.9 26.52,14.9 J2.11
  BOTTOM w0.508: L5.2 13.63,24.36 C9.1 12.93,23.65 13.43,23.15 13.43,22.02 v2(13.43,21.25)
  BOTTOM w0.762: v2(15.32,34.21) 21.04,34.21 v2(23.32,36.49) 31.77,36.49 31.81,36.45 v3(32.82,36.45)
DTR: length 9
  BOTTOM w0.203: R21.1 25.7,41.92 26,41.63 26,40.8 26.23,40.58 26.24,40.58 26.24,40.58 Q2.2 27.1,40.58 28.84,42.32 28.84,42.99 J51.3
DVP_HREF: length 21.9
  TOP w0.127: v1(20.73,16.17) 20.29,16.17 19.58,16.88 19.58,17.42 19.58,18.29 19.58,18.29 19.58,20.62 14.42,25.78 13.73,25.78 U2.5
  SIG w0.127: v1(20.73,16.17) 20.73,16.63 v1(22.03,17.92)
  BOTTOM w0.127: v1(22.03,17.92) 22.61,18.51 25.01,18.51 25.52,18 J2.9
DVP_PCLK: length 21.5
  TOP w0.127: v1(18.24,24.43) 17.66,25.01 17.34,25.01 16.74,25.62 16.38,25.97 16.38,27 15.78,27.6 15.36,27.6 14.97,27.99 U2.12
  SIG w0.127: v1(18.24,24.43) 18.24,23.43 23.26,18.4 25.64,18.4 26.51,17.53 v1(29.53,17.53)
  BOTTOM w0.127: J2.17 29.52,17.29 29.52,17.29 29.52,17.44 29.53,17.45 v1(29.53,17.53)
DVP_VSYNC: length 20.5
  TOP w0.127: U2.15 15.55,29.88 15.96,29.88 v1(16.63,29.22)
  SIG w0.127: v1(16.63,29.22) 16.63,28.21 17.26,27.58 17.26,23.33 23.38,17.2 24.73,17.2 v1(25.04,17.52)
  BOTTOM w0.127: v1(25.04,17.52) 24.7,17.52 24.52,17.33 24.52,17.17 24.52,17.17 J2.7
DVP_Y2: length 28.6
  TOP w0.127: U2.6 13.97,26.03 14.53,26.03 19.83,20.73 19.83,18.18 19.83,17.2 20.43,16.61 21.53,16.61 21.96,16.18 29.26,16.18 29.97,16.89 31.12,16.89 31.51,17.28 v1(31.51,18.27)
  BOTTOM w0.127: v1(31.51,18.27) 31.04,18.27 30.52,17.75 J2.19
DVP_Y3: length 45
  TOP w0.127: v1(7.64,29.4) 8.15,29.4 8.3,29.25 8.3,29.23 U2.38
  BOTTOM w0.127: J2.21 31.52,12.69 29.96,11.13 22.42,11.13 20.9,12.65 20.9,15.28 19.7,16.48 19.7,20.68 16.6,23.78 16.6,27.7 12.69,31.61 9.85,31.61 v1(7.64,29.4)
DVP_Y4: length 49.3
  TOP w0.127: v1(7.75,26.68) 9.38,26.68 9.53,26.84 9.53,26.84 U2.42
  BOTTOM w0.127: v1(7.75,26.68) 8.28,26.68 8.9,27.31 8.9,30.31 9.96,31.36 12.58,31.36 16.34,27.59 16.34,23.68 19.44,20.58 19.44,16.38 20.65,15.17 20.65,12.55 22.31,10.88 22.52,10.88 30.07,10.88 32.02,12.83 J2.22
DVP_Y5: length 27.3
  TOP w0.127: U2.16 15.33,30.17 16.32,30.17 17.23,29.27 v1(17.23,28.58)
  SIG w0.127: v1(31.02,17.61) 30.5,17.09 26.59,17.09 25.66,18.02 24.9,18.02 24.38,17.51 23.43,17.51 17.51,23.43 17.51,27.85 17.23,28.14 v1(17.23,28.58)
  BOTTOM w0.127: J2.20 31.02,16.18 v1(31.02,17.61)
DVP_Y6: length 25.7
  TOP w0.127: v1(30.34,18.25) 30.34,17.62 29.16,16.44 22.07,16.44 20.34,18.17 20.34,20.94 14.74,26.54 14.45,26.54 13.98,27.01 U2.8
  BOTTOM w0.127: J2.18 30.02,17.93 v1(30.34,18.25)
DVP_Y7: length 24.3
  TOP w0.127: U2.11 14.72,27.75 15.13,27.34 15.68,27.34 16.13,26.89 16.13,25.87 17.24,24.76 20.85,21.15 20.85,18.38 22.28,16.94 26.67,16.94 28.18,18.44 v1(29.35,18.44)
  BOTTOM w0.127: v1(29.35,18.44) 29.02,18.12 J2.16
DVP_Y8: length 23.1
  TOP w0.127: v1(28.38,17.98) 28.06,17.66 28.06,17.66 27.09,16.69 22.18,16.69 20.6,18.27 20.6,21.04 17.13,24.5 15.87,25.76 15.87,26.79 15.57,27.09 14.89,27.09 U2.10
  BOTTOM w0.127: J2.14 28.02,17.62 28.06,17.66 28.06,17.66 v1(28.38,17.98)
DVP_Y9: length 21.4
  TOP w0.127: U2.7 14.21,26.28 14.63,26.28 20.09,20.83 20.09,18.08 20.09,17.57 20.39,17.26 v1(20.45,17.26)
  SIG w0.127: v1(20.45,17.26) 20.76,17.58 20.76,17.58 v1(21.52,18.34)
  BOTTOM w0.127: v1(21.52,18.34) 21.83,18.65 21.99,18.81 25.38,18.81 27.02,17.17 J2.12
EN: length 40.1
  TOP w0.127: R16.2 18.71,39.97 18.65,39.92 v1(18.65,39.23) 19.37,38.51 19.37,31.66 v1(17.7,29.99) ; v1(15.42,26.53) 15.16,26.79 14.68,26.79 14.23,27.25 U2.9
  TOP w0.203: v1(31.91,42.38) 31.91,39.83 31.31,39.23 29.42,39.23 ; v1(18.65,39.23) 29.42,39.23 ; 29.42,39.23 29.43,39.21 U25.6 ; R16.2 18.71,41.03 18.71,41.04 C22.1 18.71,42.66 17.99,43.39 SW2.2
  SIG w0.127: v1(15.42,26.53) 16.1,27.21 16.1,29.37 16.72,29.99 v1(17.7,29.99)
  BOTTOM w0.254: v1(31.91,42.38) 31.11,42.38 Q1.3
FLASH_CLK: length 4.5
  TOP w0.127: U2.31 9.52,31.47 9.52,32.92 9.22,33.22 9.22,33.22 U3.6
G: length 21.6
  TOP w0.127: U2.24 13.22,32.02 13.22,34.24 14.84,35.85 15.67,35.85 16.6,36.78 16.6,37.94 15.95,38.58 v1(15.95,38.85)
  BOTTOM w0.127: v1(15.95,38.85) 13.88,40.92 13.88,47.49 14.38,47.99 14.38,49.25 Q4.1
I2C_SCL: length 33.5
  TOP w0.127: v1(6.98,31.35) 7.48,30.86 7.66,30.86 U2.36 ; R36.1 23.52,14.03 v1(23.67,14.18)
  BOTTOM w0.127: v1(23.67,14.18) 23.67,14.62 23.66,14.63 23.66,15.07 23.52,15.21 J2.5 23.52,17.17 23.26,17.43 21.69,17.43 20.21,18.91 20.21,20.89 17.11,23.99 17.11,27.91 12.9,32.12 12.69,32.12 7.76,32.12 v1(6.98,31.35)
I2C_SDA: length 32.7
  TOP w0.127: v1(22.35,14.18) 22.52,14.01 R37.1 ; v1(7.71,31.3) 8.03,30.99 U2.35
  BOTTOM w0.127: v1(7.71,31.3) 8.28,31.87 12.79,31.87 16.85,27.81 16.85,23.89 19.96,20.78 19.96,18.8 21.18,17.58 21.18,14.85 21.85,14.18 v1(22.35,14.18) 22.35,14.99 22.52,15.17 22.52,15.18 22.52,15.19 J2.3
IO0: length 35.4
  TOP w0.203: v1(21.72,38.69) 21.72,36.94 21.71,36.93 v1(21.71,36.45) ; U2.23 13.52,31.81 13.52,33.9 v1(15.02,35.41) ; v1(25.99,42.43) 25.99,41.56 24.86,40.44 v1(21.72,40.44)
  TOP w0.254: v1(21.72,40.44) 21.72,41.32 22.66,42.26 22.66,49.71 22.02,50.35 SW1.2
  SIG w0.203: v1(21.71,36.45) 20.48,35.22 17.27,35.22 17.08,35.41 v1(15.02,35.41)
  BOTTOM w0.203: v1(21.72,40.44) v1(21.72,38.69) ; Q2.3 v1(25.99,42.43)
IO2: length 26.1
  TOP w0.127: U2.22 13.81,31.61 13.81,33.56 16.85,36.61 16.85,38.38 v1(16.67,38.56)
  BOTTOM w0.127: v1(16.67,38.56) 16.67,39.01 16.38,39.3 15.86,39.3 14.14,41.02 14.14,42.56 14.89,43.32 15.82,43.32 16.48,43.98 16.48,48.17 18.42,50.11 18.42,51.51 Q3.1
IO12: length 3.9
  TOP w0.127: U2.18 15.43,31.25 16.19,31.25 R9.2
IO16: length 19.4
  TOP w0.127: U4.1 12.68,43.49 12.68,42.57 15.05,40.2 R10.2 15.42,39.67 15.42,38.75 15.5,38.67 15.5,38.67 15.76,38.41 16.34,37.83 16.34,36.91 15.54,36.11 14.73,36.11 12.97,34.34 12.97,33.07 U2.25
IO17: length 12.4
  TOP w0.127: U4.6 11.4,41.18 10.75,41.18 v1(10.05,40.49) ; U2.27 11.44,31.54 11.12,31.86 v1(11.12,34.09)
  SIG w0.127: v1(10.05,40.49) 11.12,39.42 v1(11.12,34.09)
IO25: length 19.9
  TOP w0.127: v1(18.79,23.99) 18.79,25.22 18.35,25.66 17.41,25.66 17.25,25.83 16.89,26.18 16.89,27.21 16,28.1 15.77,28.1 15.47,28.41 U2.14
  SIG w0.127: v1(26.81,18.03) 26.37,18.03 25.75,18.65 23.37,18.65 18.79,23.23 v1(18.79,23.99)
  BOTTOM w0.127: J2.13 27.52,17.77 27.26,18.03 v1(26.81,18.03)
LED_B: length 110.8
  SIG w0.508: v2(22.15,6.69) 25.34,9.88 35.36,9.88 38.43,12.95 v2(39.19,12.95)
  BOTTOM w0.254: R74.1 21.09,50.54 20.7,50.15 20.7,47.75 Q5.3
  BOTTOM w0.508: R77.1 22.89,4.91 22.89,5.94 v2(22.15,6.69) 21.39,6.69 21.38,6.7 20.44,6.7 15.72,11.42 15.04,11.42 14.1,12.37 12.65,12.37 11.39,13.63 11.39,13.7 R86.1 ; R80.1 48.96,22.67 ; 48.96,22.67 47.18,24.46 47.18,32.81 arc(46.6,35.68) 44.98,38.12 39.11,43.98 39.11,44.53 39.91,45.33 40.02,45.33 R83.1 38.31,48.04 arc(36.4,49.32) 34.14,49.77 23.28,49.77 22.77,50.28 R74.1 ; 48.96,22.67 47.68,21.39 arc(47.35,20.9) 47.24,20.33 arc(46.99,19.09) 46.29,18.05 42.57,14.33 arc(42.14,13.67) 41.99,12.9 41.99,12.24 arc(41.93,11.98) 41.79,11.76 41.15,11.13 arc(40.55,10.73) R71.1 39.19,11.22 v2(39.19,12.95)
LED_G: length 122.3
  SIG w0.508: v2(35.03,4.67) 30.73,8.98 25.73,8.98 v2(20.91,4.16)
  BOTTOM w0.254: R75.1 19.94,52.04 19.37,52.62 17.85,52.62 16.79,51.56 16.79,49.7 Q4.3
  BOTTOM w0.508: v2(35.03,4.67) 40.09,9.73 40.77,9.73 R72.1 42.64,10.71 arc(42.81,10.96) 42.87,11.26 arc(43.23,13.06) 44.25,14.58 50.34,20.67 51.19,20.67 51.45,20.41 R81.1 51.9,20.86 arc(52.06,21.24) 51.9,21.62 48.34,25.18 arc(48.15,25.46) 48.09,25.8 48.09,28.51 arc(48.38,30) 49.23,31.26 arc(50.62,33.34) 51.1,35.8 arc(51.01,36.3) 50.72,36.72 41.48,45.97 41.48,46.76 R84.1 40.58,48.29 arc(37.28,50.49) 33.39,51.27 23.42,51.27 22.79,51.9 R75.1 ; R78.1 20.99,3.05 20.99,4.07 v2(20.91,4.16) 14.65,10.42 12.16,10.42 R87.1
LED_R: length 126
  TOP w0.254: v1(21.67,51.47) v1(21.67,53.55)
  SIG w0.508: v2(20.14,2.26) 26.01,8.13 29.74,8.13 v2(35.49,2.37)
  BOTTOM w0.254: R76.1 22.03,53.55 v1(21.67,53.55) ; Q3.3 21,51.47 v1(21.67,51.47)
  BOTTOM w0.508: R76.1 22.73,53.27 23.24,52.76 32.63,52.76 arc(38.31,51.63) R85.1 43.12,48.4 42.76,48.04 42.76,47.32 50.47,39.61 arc(51.99,37.34) 52.52,34.66 arc(52.24,33.26) 51.45,32.08 50.24,30.87 arc(49.29,29.45) 48.96,27.77 48.96,26.25 arc(49.06,25.75) 49.34,25.33 50.83,23.84 arc(51.38,23.47) 52.04,23.34 52.63,23.34 arc(53.26,23.08) 53.53,22.44 53.53,21.21 arc(53.29,20.04) R82.1 52.25,19.05 52.15,19.15 51.24,19.15 49.17,17.07 49.17,17.06 48.72,16.62 48.71,16.62 44.47,12.38 arc(44.08,11.79) 43.94,11.1 43.94,10.17 arc(43.79,9.43) 43.38,8.81 R73.1 42.6,8.04 42.24,8.4 41.52,8.4 v2(35.49,2.37) ; R88.1 11.27,8.5 13.9,8.5 v2(20.14,2.26) R79.1
PWDN: length 4
  TOP w0.127: v1(24.9,14.35) 25.41,13.85 26.09,13.85 R34.2
  BOTTOM w0.127: v1(24.9,14.35) 24.9,14.94 25.02,15.05 J2.8
RTS: length 10.3
  TOP w0.203: v1(32.98,42.38) 32.49,42.87 30.45,42.87 30.16,42.58 v1(30.16,39.91)
  BOTTOM w0.203: J51.4 33.36,43.99 33.44,43.91 33.44,43.83 33.98,43.29 R70.1 33.5,42.37 33.5,42.38 v1(32.98,42.38) ; Q1.2 v1(30.16,39.91)
RXD0: length 41.6
  TOP w0.127: U2.40 8.96,27.25 8.68,27.25 v1(8.37,27.57)
  SIG w0.203: v1(14.11,36.32) 15.33,36.32 16.75,37.74 27.68,37.74 28.27,38.33 28.27,43.98 28.28,43.99 J51.2
  BOTTOM w0.203: v1(8.37,27.57) 7.99,27.95 7.15,27.95 4.4,30.7 4.4,32.84 7.47,35.91 13.69,35.91 v1(14.11,36.32)
SCS/CMD: length 11.4
  TOP w0.127: v1(9.95,33.57) 9.95,31.54 U2.30 ; U3.1 6.96,39.07 v1(6.96,39.04)
  SIG w0.127: v1(6.96,39.04) 9.95,36.05 v1(9.95,33.57)
SDI/SD1: length 13.6
  TOP w0.127: U2.33 8.48,31.52 8.48,32.16 U3.5 6.29,34.35 6.29,35.38 10,39.09 11,39.09 U4.5
SDO/SD0: length 21.5
  TOP w0.127: v1(9.01,32.63) 9.01,31.49 U2.32 ; U3.2 6.18,38.06 6.18,38.06 v1(6.49,37.74) 10.78,42.03 10.78,43.6 U4.2
  SIG w0.127: v1(6.49,37.74) 9.01,35.23 v1(9.01,32.63)
SHD/SD2: length 17.4
  TOP w0.127: U4.7 12.08,42.3 12.08,42.3 v1(11.67,42.71) ; v1(10.25,38.44) 8.32,36.51 8.32,35.92 U3.7 10.86,33.38 10.86,32.75 10.77,32.66 10.77,31.71 U2.28
  SIG w0.127: v1(10.25,38.44) 9.06,39.63 9.06,40.53 11.14,42.61 11.14,42.61 11.23,42.71 v1(11.67,42.71)
SWP/SD3: length 22.6
  TOP w0.127: v1(10.42,32.93) 10.42,31.56 U2.29 ; U3.3 5.78,36.66 6.63,36.66 v1(8.61,38.65) ; U4.3 v1(9.88,42.7)
  SIG w0.127: v1(10.42,32.93) 10.42,36.84 v1(8.61,38.65) 7.84,39.42 7.84,40.65 v1(9.88,42.7)
TXD0: length 5
  BOTTOM w0.203: J51.1 24.76,44.97 24.76,44.97 24.04,44.97 23.37,44.29 R3.2
WDI: length 30.5
  TOP w0.127: U2.39 9,28.21 7.67,28.21 v1(7.13,28.75)
  TOP w0.203: U25.1 24.6,38.35 24.29,38.05 R89.2 23.33,37.39 23.11,37.17 v1(22.27,37.17)
  SIG w0.127: v1(22.27,37.17) 22.27,36.32 20.86,34.92 13.18,34.92 12.95,34.69 v1(12.43,34.69)
  BOTTOM w0.127: v1(12.43,34.69) 8.62,34.69 6.23,32.29 6.23,29.65 6.36,29.52 v1(7.13,28.75)
N16860839: length 7.3
  TOP w0.127: C5.1 10.57,20.07 10.57,20.12 R1.2 11.39,20.94 11.39,20.94 C6.2 12.18,21.73 12.18,22.21 11.53,22.85 11.53,23.74 11.2,24.07 11.2,25.54 11.43,25.77 U2.48
N16860948: length 3.9
  TOP w0.203: U2.3 13.19,25.33 13.68,25.33 U2.4
  TOP w0.508: v2(14.66,24.6) 13.93,25.33 13.68,25.33
  BOTTOM w0.508: L5.1 14.26,25 v2(14.66,24.6)
N16861170: length 7.6
  TOP w0.229: C14.2 16.17,21.86 16.18,21.86 16.59,21.45 16.59,21.44 C15.2 17.47,20.56 arc(18.07,19.11) 17.47,17.66 16.01,16.2 ; 16.01,16.2 16.01,16.2 ; 16.01,16.2 J39.1
N16861179: length 7.3
  TOP w0.127: U2.44 7.56,23.88 5.91,23.88 U1.3 4.85,24.94 C2.1
N16861214: length 3.9
  TOP w0.254: 8.59,23.46 8.59,22 C1.1 ; 8.59,23.46 U1.1 ; 8.59,23.46 9.2,22.85 R2.1
N16861260: length 5.4
  TOP w0.127: U2.47 10.88,25.71 10.88,23.98 11.23,23.63 C6.1 10.92,21.74 10.92,21.74 R1.1
N16861530: length 34.6
  TOP w0.127: v1(7.65,27.47) 8.16,26.95 9.14,26.95 9.7,27.51 U2.41
  SIG w0.203: v1(18.03,38.26) 18.52,38.26 18.59,38.18 22.72,38.18 22.87,38.34 v1(23.36,38.34)
  BOTTOM w0.203: v1(7.65,27.47) 7.17,27.47 3.74,30.9 3.74,33.18 8.44,37.88 17.66,37.88 v1(18.03,38.26) ; v1(23.36,38.34) 23.36,38.37 23.38,38.4 23.38,40.55 23.37,40.56 R3.1
N16861598: length 4.8
  TOP w0.127: R2.2 9.09,24.23 9.09,24.92 U2.45
N16884685: length 3.8
  TOP w0.229: U2.2 12.5,25.52 L4.1 15.16,22.86 C14.1
N16908427: length 6.1
  BOTTOM w0.203: Q2.1 28.57,41.08 28.92,41.44 33.47,41.44 33.5,41.47 R70.2
N16908429: length 9.4
  BOTTOM w0.203: Q1.1 32.06,39.76 31.53,39.23 25.79,39.23 25.06,39.95 R21.2
N16960286: length 6.6
  TOP w0.508: U17.3 40.67,6.05 U17.3 ; U17.3 39.5,7.22 39.5,9.54 v1(38.41,10.63)
  BOTTOM w0.508: R71.2 38.51,10.63 v1(38.41,10.63)
N16960306: length 5.2
  TOP w0.508: U17.2 v1(38.28,6.32)
  BOTTOM w0.508: R72.2 38.73,6.79 38.73,6.76 v1(38.28,6.32)
N16960332: length 8.3
  TOP w0.508: U17.1 37.36,2.74 v2(37.31,2.74)
  BOTTOM w0.508: R73.2 v2(37.31,2.74)
N16960785: length 4.8
  TOP w0.254: v1(26.91,50.54) 25.32,50.54 U18.3
  BOTTOM w0.254: R74.2 v1(26.91,50.54)
N16960795: length 4.8
  TOP w0.254: v1(26.93,52.04) 25.33,52.04 U18.2
  BOTTOM w0.254: R75.2 v1(26.93,52.04)
N16960797: length 5.6
  TOP w0.254: v1(27.29,53.55) 26.59,53.55 26.57,53.54 U18.1
  BOTTOM w0.254: R76.2 v1(27.29,53.55)
N16961158: length 5.3
  TOP w0.508: v2(21.02,5.35) 20.49,4.81 18.5,4.81 U19.3
  BOTTOM w0.508: R77.2 21.08,5.27 21.08,5.29 v2(21.02,5.35)
N16961160: length 5.7
  TOP w0.508: U19.2 v2(17.55,5.98)
  BOTTOM w0.508: v2(17.55,5.98) 18.09,5.45 18.4,5.45 R78.2
N16961162: length 8.7
  TOP w0.508: U19.1 13.9,6.8 v2(13.81,6.8)
  BOTTOM w0.508: R79.2 18.24,2.37 v2(13.81,6.8)
N16961522: length 5.9
  TOP w0.508: U20.3 49.83,18.1 49.83,20.5 v1(49.03,21.3)
  BOTTOM w0.508: R80.2 49.05,21.3 v1(49.03,21.3)
N16961524: length 5.6
  TOP w0.508: v2(48.4,17.38) 49.92,15.87 U20.2
  BOTTOM w0.508: v2(48.4,17.38) 48.94,17.92 48.96,17.92 R81.2
N16961526: length 8
  TOP w0.508: U20.1 v2(47.79,13.71)
  BOTTOM w0.508: v2(47.79,13.71) 48.32,14.25 48.32,14.74 R82.2
N16961899: length 7
  TOP w0.508: v2(40.23,44.57) 41.9,46.24 42.62,46.24 43.04,45.82 43.76,45.82 U21.3
  BOTTOM w0.508: R83.2 40.53,44.57 v2(40.23,44.57)
N16961901: length 4.9
  TOP w0.508: U21.2 44.5,44.43 v2(44.5,44.38)
  BOTTOM w0.508: v2(44.5,44.38) 43.96,44.91 43.95,44.91 R84.2
N16961903: length 7.4
  TOP w0.508: v2(47.93,43.61) 47.93,43.67 46.89,44.7 U21.1
  BOTTOM w0.508: R85.2 v2(47.93,43.61)
N16962291: length 5
  TOP w0.508: v1(9.71,14.19) 9.26,14.64 7.31,14.64 U22.3
  BOTTOM w0.508: v1(9.71,14.19) 9.85,14.34 9.86,14.34 R86.2
N16962293: length 5.5
  TOP w0.508: v2(6.56,16.02) 6.56,16.02 U22.2
  BOTTOM w0.508: R87.2 8.6,13.98 8.6,13.98 v2(6.56,16.02)
N16962295: length 7.2
  TOP w0.508: v2(3.33,16.46) 3.33,16.45 U22.1
  BOTTOM w0.508: R88.2 3.87,15.91 3.87,15.92 v2(3.33,16.46)
N16988764: length 1.6
  TOP w0.508: C61.1 26.14,36.46 26.15,36.45 U25.3

## Copper pours and planes (outline as drawn; the poured copper is in the pictures)
AGND on TOP: 54.53,23.92 46.62,7.83 30.45,0.06 30.45,1.51 27.3,4.66 24.14,1.51 24.14,0.06 7.97,7.83 0.06,23.92 1.48,23.92 4.88,27.32 1.48,30.73 0.06,30.73 27.3,54.77 54.53,30.73 53.11,30.73 49.71,27.32 53.11,23.92 ; 10 cut-outs
AGND on BOTTOM: 30.45,1.51 27.3,4.66 24.14,1.51 24.14,0.06 7.97,7.83 0.06,23.92 1.48,23.92 4.88,27.32 1.48,30.73 0.06,30.73 27.3,54.77 54.53,30.73 53.11,30.73 49.71,27.32 53.11,23.92 54.53,23.92 46.62,7.83 30.45,0.06 ; 10 cut-outs
AGND on GND, SIG: 54.53,23.92 46.62,7.83 30.45,0.06 30.45,1.51 27.3,4.66 24.14,1.51 24.14,0.06 7.97,7.83 0.06,23.92 1.48,23.92 4.88,27.32 1.48,30.73 0.06,30.73 27.3,54.77 54.53,30.73 53.11,30.73 49.71,27.32 53.11,23.92

## Text on the board
Ref Des/Silkscreen Bottom: TXD | RXD | DTR | RTS | GND | 5V
User.Comments: tTXD
Ref Des/Silkscreen Top: RST | DL | TXD | RXD | DTR | RTS | GND | 5V
NCLEGEND-1-4: FIGURE | SIZE | 12.0 | 20.0 | 25.0 | 35.429 | DRILL CHART: TOP to BOTTOM | ALL UNITS ARE IN MILS | PLATED | QTY | 772 | 32 | 6
